# Altium PCB PCB1.PcbDoc
Units mil, origin at the board's own origin, x right, y up, seen from the top; angles counter-clockwise.
Board outline 2692.03 x 1845.03 mil, 2 copper layers (Top Layer, Bottom Layer); 80 components, 14 nets, 224 pads, 20 vias.
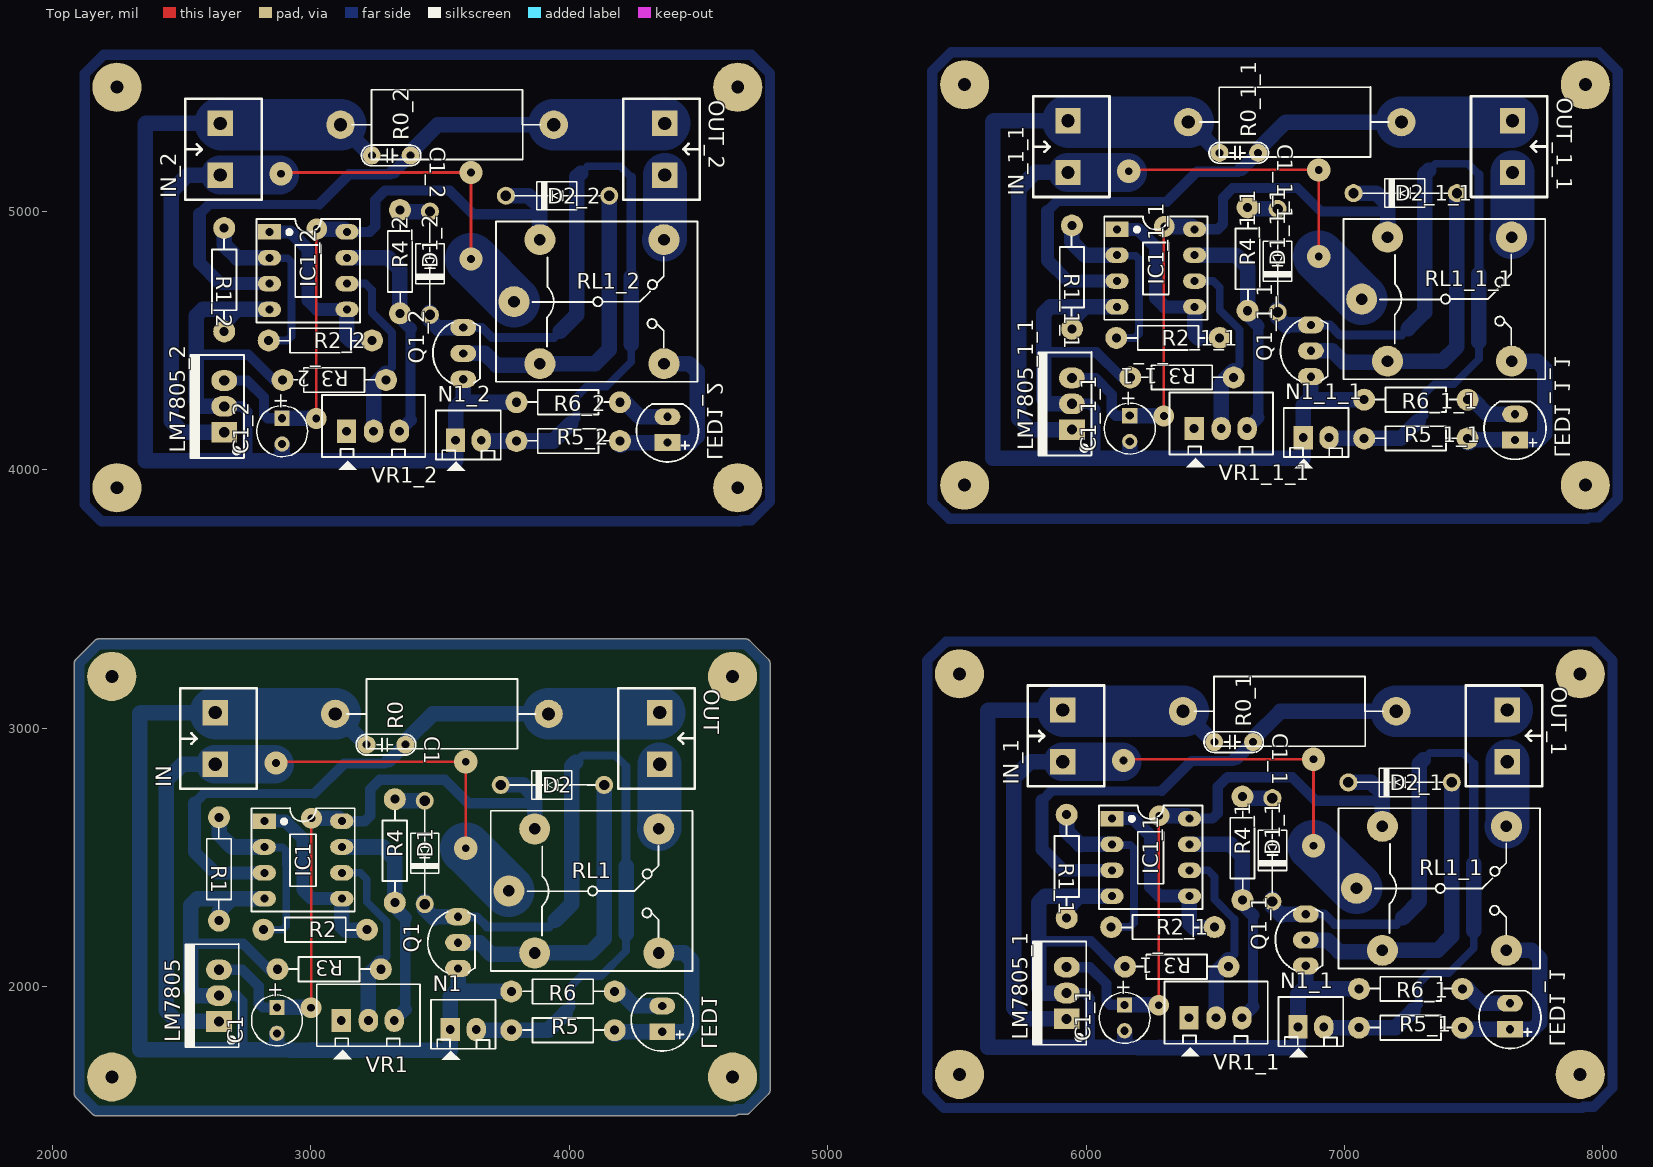
[diagram p0: Top Layer view]
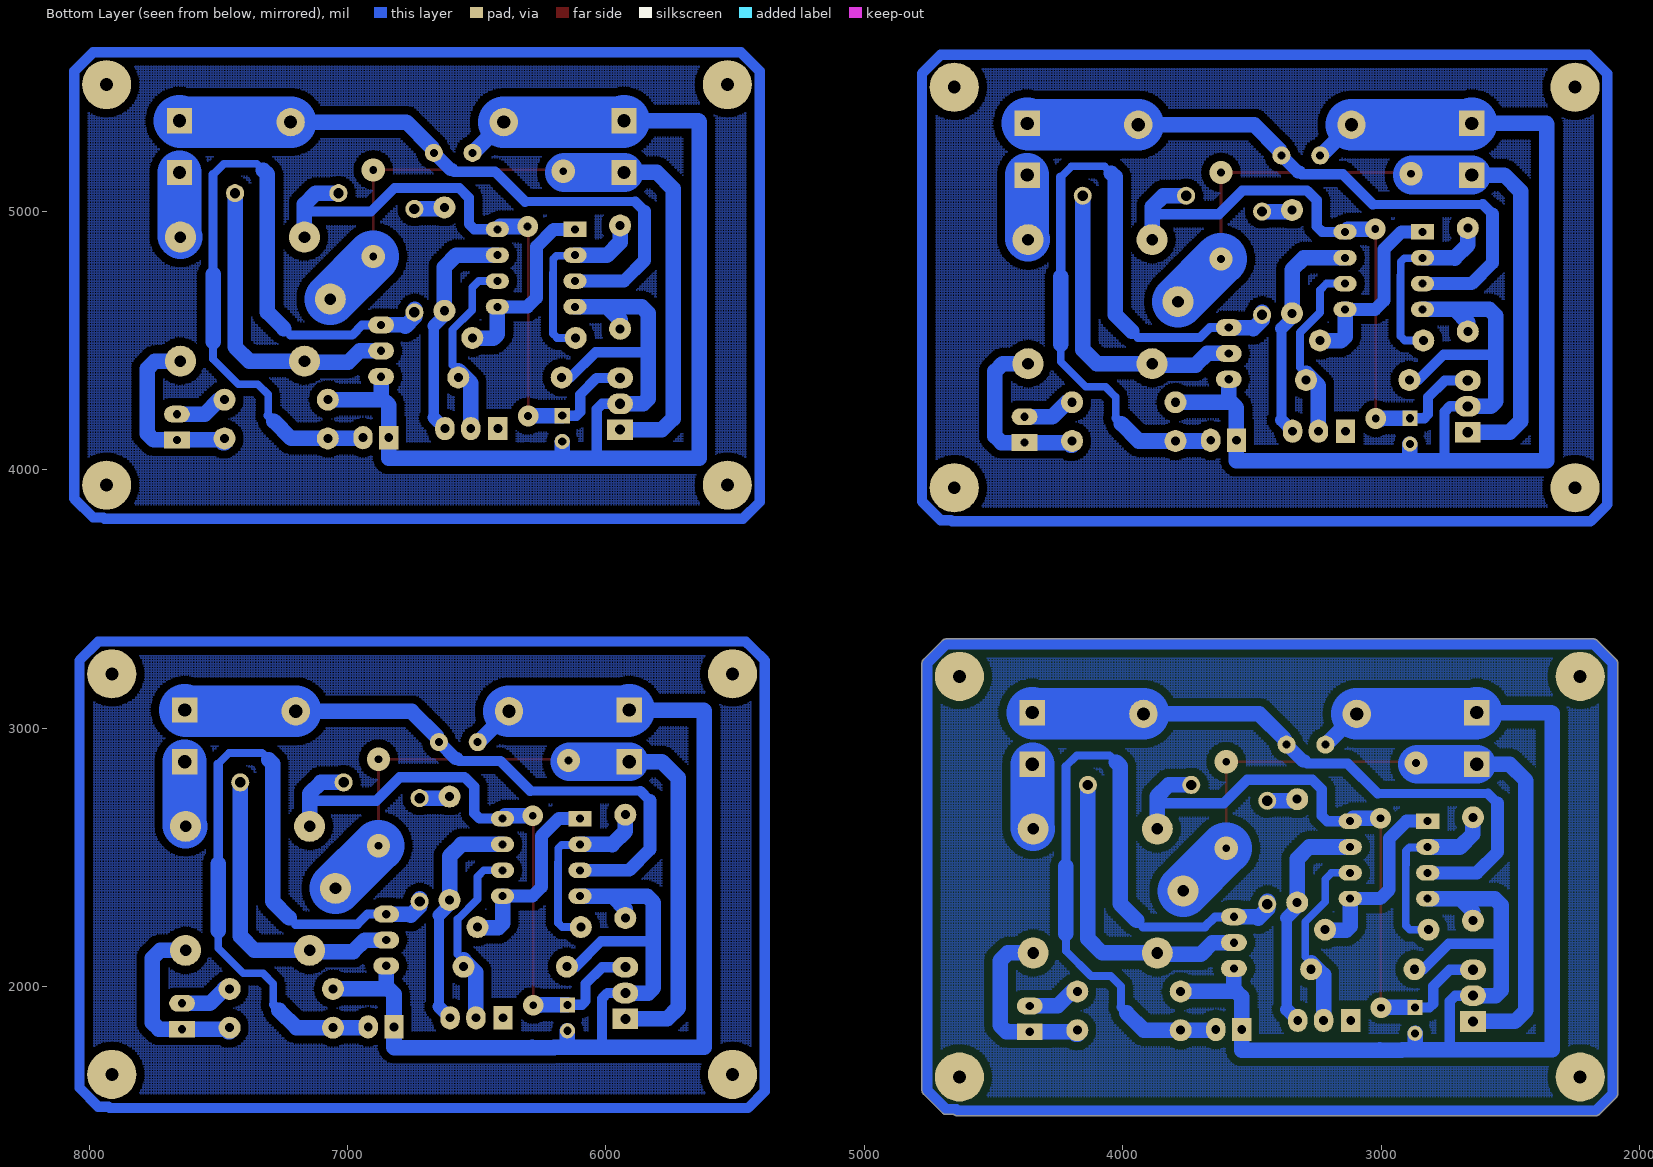
[diagram p1: Bottom Layer view, seen from below]

## Layer stack, top to bottom
Top Solder: solder mask 0.4, Solder Resist, Dk 3.5
Top Layer: signal copper 1.4
Dielectric 1: dielectric 12.6, FR-4, Dk 4.8
Bottom Layer: signal copper 1.4
Bottom Solder: solder mask 0.4, Solder Resist, Dk 3.5

## Board outline
2090.88,1570.81 cw(c2105,1585) 2084.99,1585 2084.99,3251.78 cw(c2105,3251.78) 2090.88,3265.96 2090.85,3265.93 2164.07,3339.15 2164.04,3339.12 cw(c2178.22,3325) 2178.22,3345.01 4683.78,3345.01 cw(c4683.78,3325) 4697.96,3339.12 4697.93,3339.15 4771.15,3265.93 4771.12,3265.96 cw(c4757,3251.78) 4777.02,3251.78 4777.02,1598.22 cw(c4757,1598.22) 4771.12,1584.04 4771.15,1584.07 4697.93,1510.85 4697.96,1510.88 cw(c4683.78,1525) 4683.78,1504.98 4653.23,1504.98 cw(c4640,1520) 4640,1499.98 2170,1499.98 cw(c2170,1520) 2155.81,1505.88 2155.85,1505.85

## Design rules (kind name [scope] priority, off if disabled: settings)
Clearance [All] p1: gap=30
PolygonConnect [All] p1: connectstyle=Relief reliefconductorwidth=10 reliefentries=4 polygonreliefangle="90 Angle" airgapwidth=10
RoutingVias [All] p1: holewidth=28 width=50 viastyle="Through Hole" minholewidth=28 minwidth=50 maxholewidth=28 maxwidth=50
SolderMaskExpansion [All] p1: expansion=4
Width [All] p1: maxlimit=200 minlimit=10 preferedwidth=60 toplayer_maxwidth=10 toplayer_prefwidth=10 bottomlayer_minwidth=30 minimp=50.000000 maximp=50.000000 favimp=50.000000
30 further rules are at their usual default settings.

## Classes and differential pairs
component class "Nguyen Ly": C1 D1 D2 IC1 IN LED1 LM7805 N1 OUT Q1 R0 R1 R2 R3 R4 R5 R6 RL1 VR1

## Components (designator, comment, footprint, x,y, rotation, side; value= is the part's Value field where it differs from the comment)
C1 "104" CN1.5 3286,2936 r0 top
C1 "50v 100uF" CA-ALU-5L 2869,1869 r270 top
C1_1 "50v 100uF" CA-ALU-5L 6149,1879 r270 top (schematic designator C1)
C1_1 "104" CN1.5 6566,2946 r0 top (schematic designator C1)
C1_1_1 "104" CN1.5 6586,5226 r0 top (schematic designator C1)
C1_1_1 "50v 100uF" CA-ALU-5L 6169,4159 r270 top (schematic designator C1)
C1_2 "50v 100uF" CA-ALU-5L 2889,4149 r270 top (schematic designator C1)
C1_2 "104" CN1.5 3306,5216 r0 top (schematic designator C1)
D1 "Diode" DIO-1A 3441,2719 r270 top
D1_1 "Diode" DIO-1A 6721,2729 r270 top (schematic designator D1)
D1_1_1 "Diode" DIO-1A 6741,5009 r270 top (schematic designator D1)
D1_2 "Diode" DIO-1A 3461,4999 r270 top (schematic designator D1)
D2 "Diode" DIO-1A 4135,2780 r180 top
D2_1 "Diode" DIO-1A 7415,2790 r180 top (schematic designator D2)
D2_1_1 "Diode" DIO-1A 7435,5070 r180 top (schematic designator D2)
D2_2 "Diode" DIO-1A 4155,5060 r180 top (schematic designator D2)
IC1 "LM358" DIP8 2970,2495 r270 top
IC1_1 "LM358" DIP8 6250,2505 r270 top (schematic designator IC1)
IC1_1_1 "LM358" DIP8 6270,4785 r270 top (schematic designator IC1)
IC1_2 "LM358" DIP8 2990,4775 r270 top (schematic designator IC1)
IN "" KF2-5.08 2630,2960 r90 top
IN_1 "" KF2-5.08 5910,2970 r90 top (schematic designator IN)
IN_1_1 "" KF2-5.08 5930,5250 r90 top (schematic designator IN)
IN_2 "" KF2-5.08 2650,5240 r90 top (schematic designator IN)
LED1 "LED" LED-5-BLUE 4360,1870 r90 top
LED1_1 "LED" LED-5-BLUE 7640,1880 r90 top (schematic designator LED1)
LED1_1_1 "LED" LED-5-BLUE 7660,4160 r90 top (schematic designator LED1)
LED1_2 "LED" LED-5-BLUE 4380,4150 r90 top (schematic designator LED1)
LM7805 "LM78xx" TO220-123 2645,1865 r90 top
LM7805_1 "LM78xx" TO220-123 5925,1875 r90 top (schematic designator LM7805)
LM7805_1_1 "LM78xx" TO220-123 5945,4155 r90 top (schematic designator LM7805)
LM7805_2 "LM78xx" TO220-123 2665,4145 r90 top (schematic designator LM7805)
N1 "Button" Header2 3540,1834 r0 top
N1_1 "Button" Header2 6820,1844 r0 top (schematic designator N1)
N1_1_1 "Button" Header2 6840,4124 r0 top (schematic designator N1)
N1_2 "Button" Header2 3560,4114 r0 top (schematic designator N1)
OUT "" KF2-5.08 4350,2960 r270 top
OUT_1 "" KF2-5.08 7630,2970 r270 top (schematic designator OUT)
OUT_1_1 "" KF2-5.08 7650,5250 r270 top (schematic designator OUT)
OUT_2 "" KF2-5.08 4370,5240 r270 top (schematic designator OUT)
Q1 "2SC1815" TO92-123 3570,2170 r90 top
Q1_1 "2SC1815" TO92-123 6850,2180 r90 top (schematic designator Q1)
Q1_1_1 "2SC1815" TO92-123 6870,4460 r90 top (schematic designator Q1)
Q1_2 "2SC1815" TO92-123 3590,4450 r90 top (schematic designator Q1)
R0 "0.1R" RES-2W 3515,3060 r180 top
R0_1 "0.1R" RES-2W 6795,3070 r180 top (schematic designator R0)
R0_1_1 "0.1R" RES-2W 6815,5350 r180 top (schematic designator R0)
R0_2 "0.1R" RES-2W 3535,5340 r180 top (schematic designator R0)
R1 "1K" RES-1/4W 2640,2440 r270 top
R1_1 "1K" RES-1/4W 5920,2450 r270 top (schematic designator R1)
R1_1_1 "1K" RES-1/4W 5940,4730 r270 top (schematic designator R1)
R1_2 "1K" RES-1/4W 2660,4720 r270 top (schematic designator R1)
R2 "10K" RES-1/4W 3032,2215 r0 top
R2_1 "10K" RES-1/4W 6312,2225 r0 top (schematic designator R2)
R2_1_1 "10K" RES-1/4W 6332,4505 r0 top (schematic designator R2)
R2_2 "10K" RES-1/4W 3052,4495 r0 top (schematic designator R2)
R3 "1K" RES-1/4W 3056,2072 r180 top
R3_1 "1K" RES-1/4W 6336,2082 r180 top (schematic designator R3)
R3_1_1 "1K" RES-1/4W 6356,4362 r180 top (schematic designator R3)
R3_2 "1K" RES-1/4W 3076,4352 r180 top (schematic designator R3)
R4 "1K" RES-1/4W 3330,2540 r90 top
R4_1 "1K" RES-1/4W 6610,2550 r90 top (schematic designator R4)
R4_1_1 "1K" RES-1/4W 6630,4830 r90 top (schematic designator R4)
R4_2 "1K" RES-1/4W 3350,4820 r90 top (schematic designator R4)
R5 "1K" RES-1/4W 3961,1836 r180 top
R5_1 "1K" RES-1/4W 7241,1846 r180 top (schematic designator R5)
R5_1_1 "1K" RES-1/4W 7261,4126 r180 top (schematic designator R5)
R5_2 "1K" RES-1/4W 3981,4116 r180 top (schematic designator R5)
R6 "1K" RES-1/4W 3961,1986 r180 top
R6_1 "1K" RES-1/4W 7241,1996 r180 top (schematic designator R6)
R6_1_1 "1K" RES-1/4W 7261,4276 r180 top (schematic designator R6)
R6_2 "1K" RES-1/4W 3981,4266 r180 top (schematic designator R6)
RL1 "Relay 10A/5V" "RELAY 5" 4091.5,2370 r0 top
RL1_1 "Relay 10A/5V" "RELAY 5" 7371.5,2380 r0 top (schematic designator RL1)
RL1_1_1 "Relay 10A/5V" "RELAY 5" 7391.5,4660 r0 top (schematic designator RL1)
RL1_2 "Relay 10A/5V" "RELAY 5" 4111.5,4650 r0 top (schematic designator RL1)
VR1 "20K" Header3 3123,1869 r0 top
VR1_1 "20K" Header3 6403,1879 r0 top (schematic designator VR1)
VR1_1_1 "20K" Header3 6423,4159 r0 top (schematic designator VR1)
VR1_2 "20K" Header3 3143,4149 r0 top (schematic designator VR1)

## Footprints (in the part's own frame and the unit in brackets; to place one, negate y for a bottom-side part, rotate by r counter-clockwise, add the part's x,y. Pads: shape width x height; smd on the part's side, far side on the other; paste and mask are expansions set on the pad)
CA-ALU-5L [mm] "Polarized capacitors, Aluminum Electrolytic Capacitors, 2-Leads, Body 5x11x2x0.5"
  rect 1.5x1.5 hole 0.8: 1(-1.27,0)
  round 1.5 hole 0.8: 2(1.27,0)
  silkscreen extent -2.5,-2.5 2.5,2.5, body extent -2.54,-2.54 2.54,2.54, height 13.9
CN1.5 [mil]
  round 70 hole 31: 1(-70,0) 2(80,0)
  silkscreen extent -110,-40 120,40, body extent -110,-33 120,33, height 235
DIO-1A [mil]
  round 70 hole 40: 1(0,0) 2(400,0)
  silkscreen extent 35,-55 365,55, body extent -11,-50 411,54, height 102
DIP8 [mil] "DIP, 8-Leads, Row Spacing 7.62mm, Pitch 2.54mm, Body 9.91x6.73mm"
  rect 60x90 hole 31: 1(-145,-150)
  oval 60x90 hole 31: 2(-45,-150) 3(55,-150) 4(155,-150) 5(155,150) 6(55,150) 7(-45,150) 8(-145,150)
  silkscreen extent -195,-200 205,200, body extent -213,-153 213,153, height 177
Header2 [mil] "CON2"
  rect 75x90 hole 34: 1(0,0)
  oval 75x90 hole 34: 2(100,0)
  silkscreen extent -75,-118 175,115, body extent -68,-70 168,107, height 236
Header3 [mil] "CON 3"
  rect 75x90 hole 34: 1(-5,0)
  oval 75x90 hole 34: 2(100,0) 3(200,0)
  silkscreen extent -100,-150 300,140, body extent -95,-90 295,136, height 276
KF2-5.08 [mm]
  rect 2.5x2.5 hole 1.3: 1(-2.54,0) 2(2.54,0)
  silkscreen extent -4.95,-4.08 4.95,3.43, body extent -5,-4.07 5,3.43, height 10
LED-5-BLUE [mil] "LED 2 PIN, 5 ly , Only colour, pin to pin 110mil"
  rect 65x100 hole 32: 1(-45,0)
  oval 65x100 hole 32: 2(55,0)
  silkscreen extent -120,-120 104,120, body extent -192,-116 21,120, height 339
"RELAY 5" [mil] "Reley DPDT, 8 pin, 1A, W400mil, L800mil,H 300mil"
  round 120 hole 45: 1(-325,0) 2(255,240) 3(255,-240) 4(-225,-240) 5(-225,240)
  silkscreen extent -395,-310 385,310, body extent -371,-304 381,306, height 602
RES-1/4W [mil]
  round 85 hole 35: 1(-215,5) 2(185,5)
  silkscreen extent -173,-42 141,52, body extent -227,-42 197,52, height 95
RES-2W [mil] "R2W, 2 pin, 700mil"
  round 110 hole 51.18: 1(-405,5) 2(420,5)
  silkscreen extent -355,-130 375,140, body extent -428,-126 446,134, height 277
TO92-123 [mil] "TO-92"
  oval 66x100 hole 32: 1(-100,0) 2(0,0) 3(100,0)
  silkscreen extent -117,-65 120,118, body extent -109,-66 109,95, height 245
TO220-123 [mil] "TO-220 - 1-2-3"
  rect 80x100 hole 39: 1(0,0)
  oval 80x100 hole 39: 2(100,0) 3(200,0)
  silkscreen extent -100,-76 300,130, body extent -95,-80 295,97, height 323

## Part data
C1 C1_1 C1_1_1 C1_2: library part CN
C1 C1_1 C1_1_1 C1_2: library part CN-ALU-DIP, "Capacitor (Semiconductor SIM Model)"
D1 D1_1 D1_1_1 D1_2 D2 D2_1 D2_1_1 D2_2: "Default Diode"
IC1 IC1_1 IC1_1_1 IC1_2: "Low-Power Dual Operational Amplifier"
IN IN_1 IN_1_1 IN_2 OUT OUT_1 OUT_1_1 OUT_2: library part KF2
LED1 LED1_1 LED1_1_1 LED1_2: "LED Single colour Green and Red"
LM7805 LM7805_1 LM7805_1_1 LM7805_2: "Positive Voltage Regulator"
N1 N1_1 N1_1_1 N1_2: library part Header2, "Header IDC, 2 x 1 Pin Vertical 2.54mm Pitch (Non-Boxed, Male)"
Q1 Q1_1 Q1_1_1 Q1_2: "NPN 600mW, ECB"
R0 R0_1 R0_1_1 R0_2 R1 R1_1 R1_1_1 R1_2 R2 R2_1 R2_1_1 R2_2 R3 R3_1 R3_1_1 R3_2 R4 R4_1 R4_1_1 R4_2 R5 R5_1 R5_1_1 R5_2 R6 R6_1 R6_1_1 R6_2: library part Res, "Res"
RL1 RL1_1 RL1_1_1 RL1_2: library part "Relay 5", "Relay SPDT,10A - 12VDC 5 Pin"
VR1 VR1_1 VR1_1_1 VR1_2: library part Header3, "Header IDC, 3 x 1 Pin Vertical 2.54mm Pitch (Non-Boxed, Male)"

## Free pads (board coordinates)
  round 190 hole 50: 2(2230,1650) 2(2230,3200) 2(2250,3930) 2(2250,5480) 2(4632,1650) 2(4632,3200) 2(4652,3930) 2(4652,5480) 2(5510,1660) 2(5510,3210) 2(5530,3940) 2(5530,5490) 2(7912,1660) 2(7912,3210) 2(7932,3940) 2(7932,5490)

## Via types
v1: diameter 90, hole 30, Top Layer to Bottom Layer, 12 vias
v2: diameter 80, hole 30, Top Layer to Bottom Layer, 8 vias

## Nets (pads, with @x,y where several pads share a name; then routed paths per layer and width w, separated by ;. In a path a pad name is that pad's centre, name@x,y a point inside that pad or via, vN(x,y) a via of type N, cw(c..) or ccw(c..) an arc to the next point about the centre after c; other vN are vias at no path point)
+5V: C1.1@2869,1919 D2.2 IC1.8 LM7805.3 RL1.5 | length 2514.9
  Top Layer w10: v2(3001,1918) 3001,2635 2994,2642 v2(3003,2651)
  Bottom Layer w40: LM7805.3 2735,2065 2799,2001 2799,1934 2814,1919 C1.1@2869,1919 ; IC1.8 3209,2640 3230,2661 3230,2763 3267,2800 3518,2800 3609,2709 3839,2709 3866.5,2736.5
  Bottom Layer w60: C1.1@2869,1919 2975,1919 2976,1918 v2(3001,1918) ; v2(3003,2651) 3109,2651 IC1.8 ; D2.2 3823,2780 3866.5,2736.5 RL1.5
GND: C1.1@3216,2936 C1.2@2869,1819 IC1.4 IN.2 LM7805.2 N1.1 Q1.1 R0.2 R1.2 R3.2 R6.2 | length 5551.6
  Bottom Layer w30: R3.2@2837,2067 R3.2
  Bottom Layer w40: 2536,2165 2739,2165 R3.2@2837,2067 ; LM7805.2 2714,1965 2735,1944 2735,1755
  Bottom Layer w60: IN.2 2342,3060 2339,3057 2339,1755 2735,1755 2879,1755 ; LM7805.2 2556,1965 2536,1985 2536,2165 2536,2315 2561,2340 2695,2340 ; R1.2 2645,2290 2695,2340 ; IC1.4 2695,2340 ; C1.2@2869,1819 2869,1765 2879,1755 ; 2985,3055 2995,3045 ; 3005,1755 3004,1754 ; R0.2 C1.1@3206,2944 ; Q1.1 3570,1990 ; R6.2 3579,1981 3570,1990 ; 2879,1755 2919,1755 2920,1754 3004,1754 ; 3004,1754 3539,1754 3540,1755 N1.1 3540,1960 3570,1990
  Bottom Layer w200: IN.2 2635,3055 2985,3055 R0.2
NetC1_2: C1.2@3366,2936 IC1.3 OUT.1 R0.1 | length 2420.7
  Bottom Layer w35: 2587,2747 3013,2747
  Bottom Layer w40: 2550,2710 2587,2747 ; 3013,2747 3129,2863 3287,2863 3296,2872
  Bottom Layer w50: 2550,2710 2550,2520 2630,2440 IC1.3 ; 3296,2872 3302,2872 C1.2@3366,2936
  Bottom Layer w60: C1.2@3374.5,2957.5 3472,3055 R0.1
  Bottom Layer w200: R0.1 4345,3055 OUT.1
NetD1_1: D1.1 R4.2 | length 118.5
  Bottom Layer w60: R4.2 3331,2719 D1.1
NetD1_2: D1.2 N1.2 Q1.3 R5.2 | length 2919.1
  Bottom Layer w30: 3921,2231 3946,2256 ; 4007,1920 4007,2001 4047,2041 4123,2041 4220,2138 4220,2189 4228,2197 ; 4025,2868 4051,2894 4178,2894 4220,2852
  Bottom Layer w35: Q1.3 3643,2270 3682,2231 3921,2231 ; 3985,1898 4007,1920 ; 4220,2466 4220,2852
  Bottom Layer w60: D1.2@3440,2330 3440,2301 3476,2265 3481,2270 Q1.3 ; N1.2@3637,1845 3651,1831 R5.2 3918,1831 3985,1898 ; 3946,2256 4010,2320 4010,2853 4025,2868 ; 4220,2205 4220,2466
NetD2_1: D2.1 Q1.2 RL1.4 | length 1203.5
  Bottom Layer w60: Q1.2 3653,2170 3698,2125 3861.5,2125 RL1.4 4080,2130 4135,2185 D2.1
NetIC1_1: IC1.1 IC1.5 R2.2 | length 736.9
  Bottom Layer w50: IC1.1 2902,2640 2969,2573 2969,2375 3004,2340 IC1.5
  Bottom Layer w60: IC1.5 3120,2234 3136,2218 R2.2@3204,2218
NetIC1_2: IC1.2 R1.1 R2.1 | length 735.8
  Bottom Layer w30: R2.1 2889,2220 2905,2236 2905,2471 2904,2472 2904,2525 2891,2538 2822,2538 IC1.2
  Bottom Layer w60: R1.1 2645,2590 2696,2539 2697,2540 IC1.2
NetIC1_6: IC1.6 R3.1 VR1.2 | length 683.1
  Bottom Layer w30: IC1.6 3192,2440 3217,2415 3217,2328 3294,2251 3294,2115
  Bottom Layer w60: VR1.2 3223,2045 R3.1@3271,2093
NetIC1_7: IC1.7 R4.1 VR1.3 | length 883.8
  Bottom Layer w30: R4.1@3325,2307 R4.1
  Bottom Layer w40: 3366,1912 3366,2266
  Bottom Layer w50: VR1.3 3366,1912 ; R4.1@3325,2307 3366,2266
  Bottom Layer w60: IC1.7 3279,2540 3325,2494 R4.1
NetLED1_1: LED1.1 R5.1 RL1.3 | length 691.3
  Bottom Layer w60: R5.1@4175,1815 R5.1@4181.67,1815 ; R5.1@4191.67,1825 LED1.1 4450,1825 4475,1850 4475,2100 4445,2130 RL1.3
NetLED1_2: LED1.2 R6.1 | length 207.2
  Bottom Layer w60: R6.1 4196,1981 4252,1925 LED1.2
NetOUT_2: OUT.2 RL1.2 | length 251.4
  Bottom Layer w170: RL1.2 4350,2613.5 OUT.2
VCC: IN.1 LM7805.1 RL1.1 | length 2864.8
  Top Layer w10: v1(2865,2865) 2870,2870 v1(3600,2870) v1(3600,2535)
  Bottom Layer w60: IN.1 2503,2860 2440,2797 2440,1908 2483,1865 LM7805.1
  Bottom Layer w150: IN.1 v1@2860,2860
  Bottom Layer w200: v1(3600,2535) 3601.5,2535 RL1.1
pads on no net: C1_1.1 C1_1.2 C1_1_1.1 C1_1_1.2 C1_2.1 C1_2.2 D1_1.1 D1_1.2 D1_1_1.1 D1_1_1.2 D1_2.1 D1_2.2 D2_1.1 D2_1.2 D2_1_1.1 D2_1_1.2 D2_2.1 D2_2.2 IC1_1.1 IC1_1.2 IC1_1.3 IC1_1.4 IC1_1.5 IC1_1.6 IC1_1.7 IC1_1.8 IC1_1_1.1 IC1_1_1.2 IC1_1_1.3 IC1_1_1.4 IC1_1_1.5 IC1_1_1.6 IC1_1_1.7 IC1_1_1.8 IC1_2.1 IC1_2.2 IC1_2.3 IC1_2.4 IC1_2.5 IC1_2.6 IC1_2.7 IC1_2.8 IN_1.1 IN_1.2 IN_1_1.1 IN_1_1.2 IN_2.1 IN_2.2 LED1_1.1 LED1_1.2 LED1_1_1.1 LED1_1_1.2 LED1_2.1 LED1_2.2 LM7805_1.1 LM7805_1.2 LM7805_1.3 LM7805_1_1.1 LM7805_1_1.2 LM7805_1_1.3 LM7805_2.1 LM7805_2.2 LM7805_2.3 N1_1.1 N1_1.2 N1_1_1.1 N1_1_1.2 N1_2.1 N1_2.2 OUT_1.1 OUT_1.2 OUT_1_1.1 OUT_1_1.2 OUT_2.1 OUT_2.2 Q1_1.1 Q1_1.2 Q1_1.3 Q1_1_1.1 Q1_1_1.2 Q1_1_1.3 Q1_2.1 Q1_2.2 Q1_2.3 R0_1.1 R0_1.2 R0_1_1.1 R0_1_1.2 R0_2.1 R0_2.2 R1_1.1 R1_1.2 R1_1_1.1 R1_1_1.2 R1_2.1 R1_2.2 R2_1.1 R2_1.2 R2_1_1.1 R2_1_1.2 R2_2.1 R2_2.2 R3_1.1 R3_1.2 R3_1_1.1 R3_1_1.2 R3_2.1 R3_2.2 R4_1.1 R4_1.2 R4_1_1.1 R4_1_1.2 R4_2.1 R4_2.2 R5_1.1 R5_1.2 R5_1_1.1 R5_1_1.2 R5_2.1 R5_2.2 R6_1.1 R6_1.2 R6_1_1.1 R6_1_1.2 R6_2.1 R6_2.2 RL1_1.1 RL1_1.2 RL1_1.3 RL1_1.4 RL1_1.5 RL1_1_1.1 RL1_1_1.2 RL1_1_1.3 RL1_1_1.4 RL1_1_1.5 RL1_2.1 RL1_2.2 RL1_2.3 RL1_2.4 RL1_2.5 VR1.1 VR1_1.1 VR1_1.2 VR1_1.3 VR1_1_1.1 VR1_1_1.2 VR1_1_1.3 VR1_2.1 VR1_2.2 VR1_2.3
copper on no net: | length 100372.6
  Top Layer w10: v1(2885,5145) 2890,5150 v1(3620,5150) v1(3620,4815) ; v2(3021,4198) 3021,4915 3014,4922 v2(3023,4931) ; v1(6145,2875) 6150,2880 v1(6880,2880) v1(6880,2545) ; v1(6165,5155) 6170,5160 v1(6900,5160) v1(6900,4825) ; v2(6281,1928) 6281,2645 6274,2652 v2(6283,2661) ; v2(6301,4208) 6301,4925 6294,4932 v2(6303,4941)
  Bottom Layer w30: 2837,4500 2909,4500 2925,4516 2925,4751 2924,4752 2924,4805 2911,4818 2842,4818 2840,4820 ; 2857,4347 2891,4347 ; 3140,4720 3212,4720 3237,4695 3237,4608 3314,4531 3314,4395 ; 3345,4587 3345,4605 ; 3941,4511 3966,4536 ; 4027,4200 4027,4281 4067,4321 4143,4321 4240,4418 4240,4469 4248,4477 ; 4045,5148 4071,5174 4198,5174 4240,5132 ; 6097,2230 6169,2230 6185,2246 6185,2481 6184,2482 6184,2535 6171,2548 6102,2548 6100,2550 ; 6117,2077 6151,2077 ; 6117,4510 6189,4510 6205,4526 6205,4761 6204,4762 6204,4815 6191,4828 6122,4828 6120,4830 ; 6137,4357 6171,4357 ; 6400,2450 6472,2450 6497,2425 6497,2338 6574,2261 6574,2125 ; 6420,4730 6492,4730 6517,4705 6517,4618 6594,4541 6594,4405 ; 6605,2317 6605,2335 ; 6625,4597 6625,4615 ; 7201,2241 7226,2266 ; 7221,4521 7246,4546 ; 7287,1930 7287,2011 7327,2051 7403,2051 7500,2148 7500,2199 7508,2207 ; 7305,2878 7331,2904 7458,2904 7500,2862 ; 7307,4210 7307,4291 7347,4331 7423,4331 7520,4428 7520,4479 7528,4487 ; 7325,5158 7351,5184 7478,5184 7520,5142
  Bottom Layer w35: 2607,5027 3033,5027 ; 3590,4550 3663,4550 3702,4511 3941,4511 ; 4005,4178 4027,4200 ; 4240,4746 4240,5132 ; 5867,2757 6293,2757 ; 5887,5037 6313,5037 ; 6850,2280 6923,2280 6962,2241 7201,2241 ; 6870,4560 6943,4560 6982,4521 7221,4521 ; 7265,1908 7287,1930 ; 7285,4188 7307,4210 ; 7500,2476 7500,2862 ; 7520,4756 7520,5142
  Bottom Layer w40: 2105,1598.22 2105,3251.78 2153.22,3300 2178.22,3325 4683.78,3325 4757,3251.78 4757,3230 4757,1598.22 4683.78,1525 4645,1525 4640,1520 2170,1520 2105,1585 2105,1610 ; 2125,3878.22 2125,5531.78 2173.22,5580 2198.22,5605 4703.78,5605 4777,5531.78 4777,5510 4777,3878.22 4703.78,3805 4665,3805 4660,3800 2190,3800 2125,3865 2125,3890 ; 2556,4445 2759,4445 2857,4347 ; 2570,4990 2607,5027 ; 2665,4245 2734,4245 2755,4224 2755,4035 ; 2665,4345 2755,4345 2819,4281 2819,4214 2834,4199 2889,4199 ; 3033,5027 3149,5143 3307,5143 3316,5152 ; 3140,4920 3229,4920 3250,4941 3250,5043 3287,5080 3538,5080 3629,4989 3859,4989 3886.5,5016.5 ; 3386,4192 3386,4546 ; 5385,1608.22 5385,3261.78 5433.22,3310 5458.22,3335 7963.78,3335 8037,3261.78 8037,3240 8037,1608.22 7963.78,1535 7925,1535 7920,1530 5450,1530 5385,1595 5385,1620 ; 5405,3888.22 5405,5541.78 5453.22,5590 5478.22,5615 7983.78,5615 8057,5541.78 8057,5520 8057,3888.22 7983.78,3815 7945,3815 7940,3810 5470,3810 5405,3875 5405,3900 ; 5816,2175 6019,2175 6117,2077 ; 5830,2720 5867,2757 ; 5836,4455 6039,4455 6137,4357 ; 5850,5000 5887,5037 ; 5925,1975 5994,1975 6015,1954 6015,1765 ; 5925,2075 6015,2075 6079,2011 6079,1944 6094,1929 6149,1929 ; 5945,4255 6014,4255 6035,4234 6035,4045 ; 5945,4355 6035,4355 6099,4291 6099,4224 6114,4209 6169,4209 ; 6293,2757 6409,2873 6567,2873 6576,2882 ; 6313,5037 6429,5153 6587,5153 6596,5162 ; 6400,2650 6489,2650 6510,2671 6510,2773 6547,2810 6798,2810 6889,2719 7119,2719 7146.5,2746.5 ; 6420,4930 6509,4930 6530,4951 6530,5053 6567,5090 6818,5090 6909,4999 7139,4999 7166.5,5026.5 ; 6646,1922 6646,2276 ; 6666,4202 6666,4556
  Bottom Layer w50: 2570,4990 2570,4800 2650,4720 2840,4720 ; 2840,4920 2922,4920 2989,4853 2989,4655 3024,4620 3140,4620 ; 3316,5152 3322,5152 3386,5216 ; 3343,4149 3386,4192 ; 3345,4587 3386,4546 ; 5830,2720 5830,2530 5910,2450 6100,2450 ; 5850,5000 5850,4810 5930,4730 6120,4730 ; 6100,2650 6182,2650 6249,2583 6249,2385 6284,2350 6400,2350 ; 6120,4930 6202,4930 6269,4863 6269,4665 6304,4630 6420,4630 ; 6576,2882 6582,2882 6646,2946 ; 6596,5162 6602,5162 6666,5226 ; 6603,1879 6646,1922 ; 6605,2317 6646,2276 ; 6623,4159 6666,4202 ; 6625,4597 6666,4556
  Bottom Layer w60: 2650,5140 2523,5140 2460,5077 2460,4188 2503,4145 2665,4145 ; 2650,5340 2362,5340 2359,5337 2359,4035 2755,4035 2899,4035 ; 2665,4245 2576,4245 2556,4265 2556,4445 2556,4595 2581,4620 2715,4620 ; 2665,4535 2665,4570 2715,4620 ; 2665,4935 2665,4870 2716,4819 2717,4820 2840,4820 ; 2840,4620 2715,4620 ; 2889,4099 2889,4045 2899,4035 ; 2889,4199 2995,4199 2996,4198 v2(3021,4198) ; 3005,5335 3015,5325 ; v2(3023,4931) 3129,4931 3140,4920 ; 3025,4035 3024,4034 ; 3115,5335 3226,5224 ; 3140,4620 3140,4514 3156,4498 3224,4498 ; 3140,4820 3299,4820 3345,4774 3345,4605 ; 3243,4149 3243,4325 3291,4373 ; 3345,5005 3351,4999 3461,4999 ; 3394.5,5237.5 3492,5335 3940,5335 ; 3460,4610 3460,4581 3496,4545 3501,4550 3590,4550 ; 3590,4350 3590,4270 ; 3590,4450 3673,4450 3718,4405 3881.5,4405 3886.5,4410 4100,4410 4155,4465 4155,5060 ; 3657,4125 3671,4111 3796,4111 3938,4111 4005,4178 ; 3755,5060 3843,5060 3886.5,5016.5 3886.5,4890 ; 3796,4261 3599,4261 3590,4270 ; 3966,4536 4030,4600 4030,5133 4045,5148 ; 4195,4095 4201.67,4095 ; 4196,4261 4216,4261 4272,4205 4380,4205 ; 4211.67,4105 4380,4105 4470,4105 4495,4130 4495,4380 4465,4410 4366.5,4410 ; 4240,4485 4240,4746 ; 5910,2870 5783,2870 5720,2807 5720,1918 5763,1875 5925,1875 ; 5910,3070 5622,3070 5619,3067 5619,1765 6015,1765 6159,1765 ; 5925,1975 5836,1975 5816,1995 5816,2175 5816,2325 5841,2350 5975,2350 ; 5925,2265 5925,2300 5975,2350 ; 5925,2665 5925,2600 5976,2549 5977,2550 6100,2550 ; 5930,5150 5803,5150 5740,5087 5740,4198 5783,4155 5945,4155 ; 5930,5350 5642,5350 5639,5347 5639,4045 6035,4045 6179,4045 ; 5945,4255 5856,4255 5836,4275 5836,4455 5836,4605 5861,4630 5995,4630 ; 5945,4545 5945,4580 5995,4630 ; 5945,4945 5945,4880 5996,4829 5997,4830 6120,4830 ; 6100,2350 5975,2350 ; 6120,4630 5995,4630 ; 6149,1829 6149,1775 6159,1765 ; 6149,1929 6255,1929 6256,1928 v2(6281,1928) ; 6169,4109 6169,4055 6179,4045 ; 6169,4209 6275,4209 6276,4208 v2(6301,4208) ; 6265,3065 6275,3055 ; v2(6283,2661) 6389,2661 6400,2650 ; 6285,1765 6284,1764 ; 6285,5345 6295,5335 ; v2(6303,4941) 6409,4941 6420,4930 ; 6305,4045 6304,4044 ; 6375,3065 6486,2954 ; 6395,5345 6506,5234 ; 6400,2350 6400,2244 6416,2228 6484,2228 ; 6400,2550 6559,2550 6605,2504 6605,2335 ; 6420,4630 6420,4524 6436,4508 6504,4508 ; 6420,4830 6579,4830 6625,4784 6625,4615 ; 6503,1879 6503,2055 6551,2103 ; 6523,4159 6523,4335 6571,4383 ; 6605,2735 6611,2729 6721,2729 ; 6625,5015 6631,5009 6741,5009 ; 6654.5,2967.5 6752,3065 7200,3065 ; 6674.5,5247.5 6772,5345 7220,5345 ; 6720,2340 6720,2311 6756,2275 6761,2280 6850,2280 ; 6740,4620 6740,4591 6776,4555 6781,4560 6870,4560 ; 6850,2080 6850,2000 ; 6850,2180 6933,2180 6978,2135 7141.5,2135 7146.5,2140 7360,2140 7415,2195 7415,2790 ; 6870,4360 6870,4280 ; 6870,4460 6953,4460 6998,4415 7161.5,4415 7166.5,4420 7380,4420 7435,4475 7435,5070 ; 6917,1855 6931,1841 7056,1841 7198,1841 7265,1908 ; 6937,4135 6951,4121 7076,4121 7218,4121 7285,4188 ; 7015,2790 7103,2790 7146.5,2746.5 7146.5,2620 ; 7035,5070 7123,5070 7166.5,5026.5 7166.5,4900 ; 7056,1991 6859,1991 6850,2000 ; 7076,4271 6879,4271 6870,4280 ; 7226,2266 7290,2330 7290,2863 7305,2878 ; 7246,4546 7310,4610 7310,5143 7325,5158 ; 7455,1825 7461.67,1825 ; 7456,1991 7476,1991 7532,1935 7640,1935 ; 7471.67,1835 7640,1835 7730,1835 7755,1860 7755,2110 7725,2140 7626.5,2140 ; 7475,4105 7481.67,4105 ; 7476,4271 7496,4271 7552,4215 7660,4215 ; 7491.67,4115 7660,4115 7750,4115 7775,4140 7775,4390 7745,4420 7646.5,4420 ; 7500,2215 7500,2476 ; 7520,4495 7520,4756 ; 2899,4035 2939,4035 2940,4034 3024,4034 ; 3024,4034 3559,4034 3560,4035 3560,4114 3560,4240 3590,4270 ; 6159,1765 6199,1765 6200,1764 6284,1764 ; 6179,4045 6219,4045 6220,4044 6304,4044 ; 6284,1764 6819,1764 6820,1765 6820,1844 6820,1970 6850,2000 ; 6304,4044 6839,4044 6840,4045 6840,4124 6840,4250 6870,4280
  Bottom Layer w150: 2650,5140 v1@2880,5140 ; 5910,2870 v1@6140,2870 ; 5930,5150 v1@6160,5150
  Bottom Layer w170: 4366.5,4890 4370,4893.5 4370,5140 ; 7626.5,2620 7630,2623.5 7630,2870 ; 7646.5,4900 7650,4903.5 7650,5150
  Bottom Layer w200: 2650,5340 2655,5335 3005,5335 3115,5335 ; v1(3620,4815) 3621.5,4815 3786.5,4650 ; 3940,5335 4365,5335 4370,5340 ; 5910,3070 5915,3065 6265,3065 6375,3065 ; 5930,5350 5935,5345 6285,5345 6395,5345 ; v1(6880,2545) 6881.5,2545 7046.5,2380 ; v1(6900,4825) 6901.5,4825 7066.5,4660 ; 7200,3065 7625,3065 7630,3070 ; 7220,5345 7645,5345 7650,5350

## Polygon pours and split planes (outlines as drawn)
no net on Bottom Layer "Top Layer-No Net" (hatched 90Degree grid 10 track 5, remove dead copper, pour order 6): 2198.22,5605 4703.78,5605 4777,5531.78 4777,3878.22 4710,3811.22 4698.78,3800 2190,3800 2130,3860 2130,5536.78 2198.22,5605
no net on Bottom Layer "Top Layer-No Net" (hatched 90Degree grid 10 track 5, remove dead copper, pour order 4): 5478.22,5615 7983.78,5615 8057,5541.78 8057,3888.22 7990,3821.22 7978.78,3810 5470,3810 5410,3870 5410,5546.78 5478.22,5615
no net on Bottom Layer "Top Layer-No Net" (hatched 90Degree grid 10 track 5, remove dead copper, pour order 2): 5458.22,3335 7963.78,3335 8037,3261.78 8037,1608.22 7970,1541.22 7958.78,1530 5450,1530 5390,1590 5390,3266.78 5458.22,3335
no net on Bottom Layer "Top Layer-No Net" (hatched 90Degree grid 10 track 5, remove dead copper, pour order 0): 2178.22,3325 4683.78,3325 4757,3251.78 4757,1598.22 4690,1531.22 4678.78,1520 2170,1520 2110,1580 2110,3256.78 2178.22,3325

## Text inside footprints (layer, text, board x,y; h text height)
C1: Top Overlay "+" at 2839.98,2019.59 h59.06 r270
C1_1: Top Overlay "+" at 6119.98,2029.59 h59.06 r270
C1_1_1: Top Overlay "+" at 6139.98,4309.59 h59.06 r270
C1_2: Top Overlay "+" at 2859.98,4299.59 h59.06 r270